# EAGLE board Integral_Granite (EAGLE 9.6.2)

Size 100 x 80 mm. Coordinates in mm from the lower left corner, seen from the top.
Outline: 0,0 100,0 100,80 0,80 0,0
Copper layers (1*16): Top 0.035mm / dielectric 1.5mm / Bottom 0.035mm
Design rules "default": minimum track width 6mil, minimum drill 0.35mm, track to track 6mil, track to pad 6mil, pad to pad 6mil, via to via 6mil, smd to smd 6mil, copper to edge 40mil, drill to drill 6mil, minimum pad ring 10mil, minimum via ring 8mil, stop-mask expansion 4mil, vias tented up to drill 0mil, thermal gap 10mil

## Footprints (pad centres in the part's own frame; a part is rotated, then mirrored left to right if it is on the bottom)
TB6643KQ = drill 1.05 pad 1.575 square: 1 0,0 | drill 1.05 pad 1.575: 2 2.54,0; 3 5.08,0; 4 7.62,0; 5 10.16,0; 6 12.7,0; 7 15.24,0
BS2PSHF1AALFSN = drill 1 pad 1.5: 1 -1.25,2.75; 2 1.25,2.75
C0603 = smd 1.1 x 1: 1 -0.85,0; 2 0.85,0
SE50PAJM3I = smd 3.1 x 2.2: 1 -1.21,0 | smd 1.5 x 1.52: 2 2.01,0
DIP762W60P254L460H425Q4N = drill 0.8 pad 1.2 square: 1 -3.81,1.27 | drill 0.8 pad 1.2: 2 -3.81,-1.27; 3 3.81,-1.27; 4 3.81,1.27
LEDC1608X36N = smd 0.7 x 0.95: 1 -0.9,0; 2 0.9,0
TO230P250X650X900-3P = drill 1.16 pad 1.74 square: 1 0,0 | drill 1.16 pad 1.74: 2 2.3,0; 3 4.6,0
R0603 = smd 1 x 1.1: 1 -0.85,0; 2 0.85,0
SHDRRA7W50P0X200_1X7_1590X760X = drill 0.9 pad 1.35 square: 1 0,0 | drill 0.9 pad 1.35: 2 -2,0; 3 -4,0; 4 -6,0; 5 -8,0; 6 -10,0; 7 -12,0
SHDRRA2W50P0X200_1X2_590X760X4 = drill 0.9 pad 1.35 square: 1 0,0 | drill 0.9 pad 1.35: 2 -2,0
GF063P = drill 1 pad 1.5: 1 0,0; 2 2.5,-2.5; 3 0,-5
HDRRA3W64P0X250_1X3_750X600X56 = drill 1.1 pad 1.65 square: 1 0,0 | drill 1.1 pad 1.65: 2 2.5,0; 3 5,0

## Placement (x,y rotation side)
A1  TB6643KQ  [TB6643KQ]  -58.42,67.31 0 top  (outside the outline)
A1M  BS2P-SHF-1AA__LF__SN_  [BS2PSHF1AALFSN]  -25.4,7.62 0 top  (outside the outline)
A2  TB6643KQ  [TB6643KQ]  -30.48,73.66 0 top  (outside the outline)
A2M  BS2P-SHF-1AA__LF__SN_  [BS2PSHF1AALFSN]  -49.53,7.62 0 top  (outside the outline)
B1  TB6643KQ  [TB6643KQ]  -50.8,73.66 0 top  (outside the outline)
B1M  BS2P-SHF-1AA__LF__SN_  [BS2PSHF1AALFSN]  -25.4,21.59 0 top  (outside the outline)
B2  TB6643KQ  [TB6643KQ]  -71.12,73.66 0 top  (outside the outline)
B2M  BS2P-SHF-1AA__LF__SN_  [BS2PSHF1AALFSN]  -49.53,21.59 0 top  (outside the outline)
C1  [C0603]  -43.18,77.47 0 top  (outside the outline)
D1  SE50PAJ-M3_I  [SE50PAJM3I]  -20.32,78.74 0 top  (outside the outline)
D2  SE50PAJ-M3_I  [SE50PAJM3I]  -34.29,78.74 0 top  (outside the outline)
IC5  TLP785_GB,F_  [DIP762W60P254L460H425Q4N]  -20.32,67.31 0 top  (outside the outline)
IC6  TLP785_GB,F_  [DIP762W60P254L460H425Q4N]  -34.29,67.31 0 top  (outside the outline)
LED1  SML-E12P8WT86  [LEDC1608X36N]  -45.72,82.55 0 top  (outside the outline)
LED2  SML-E12P8WT86  [LEDC1608X36N]  -62.23,82.55 0 top  (outside the outline)
LED3  SML-E12P8WT86  [LEDC1608X36N]  -21.59,86.36 0 top  (outside the outline)
Q1  2SK4017_Q_  [TO230P250X650X900-3P]  -19.05,82.55 0 top  (outside the outline)
Q2  2SK4017_Q_  [TO230P250X650X900-3P]  -31.75,82.55 0 top  (outside the outline)
R1  [R0603]  -46.99,77.47 0 top  (outside the outline)
R2  [R0603]  -50.8,77.47 0 top  (outside the outline)
R3  [R0603]  -54.61,77.47 0 top  (outside the outline)
R4  [R0603]  -58.42,77.47 0 top  (outside the outline)
R5  [R0603]  -62.23,77.47 0 top  (outside the outline)
R6  [R0603]  -66.04,77.47 0 top  (outside the outline)
R8  [R0603]  -69.85,77.47 0 top  (outside the outline)
R9  [R0603]  -73.66,77.47 0 top  (outside the outline)
SIGA  S7B-PH-K-S_LF__SN_  [SHDRRA7W50P0X200_1X7_1590X760X]  -57.15,44.45 0 top  (outside the outline)
SIGB  S7B-PH-K-S_LF__SN_  [SHDRRA7W50P0X200_1X7_1590X760X]  -22.86,57.15 0 top  (outside the outline)
SIGC  S2B-PH-K-S_LF__SN_  [SHDRRA2W50P0X200_1X2_590X760X4]  -46.99,57.15 0 top  (outside the outline)
VDD  S2B-PH-K-S_LF__SN_  [SHDRRA2W50P0X200_1X2_590X760X4]  -67.31,57.15 0 top  (outside the outline)
VDRIB  BS2P-SHF-1AA__LF__SN_  [BS2PSHF1AALFSN]  -25.4,35.56 0 top  (outside the outline)
VR1  GF063P  [GF063P]  -43.18,49.53 0 top  (outside the outline)
VS  BS3P-SHF-1AA__LF__SN_  [HDRRA3W64P0X250_1X3_750X600X56]  -25.4,45.72 0 top  (outside the outline)
VSOL  BS2P-SHF-1AA__LF__SN_  [BS2PSHF1AALFSN]  -49.53,35.56 0 top  (outside the outline)

## Library data of the parts
A1 A2 B1 B2 = TB6643KQ; DESCRIPTION: IC MOTOR DRIVER 10V-45V 7HSIP; HEIGHT: 16.5mm; MANUFACTURER_NAME: Toshiba; MANUFACTURER_PART_NUMBER: TB6643KQ
A1M A2M B1M B2M VDRIB VSOL = BS2P-SHF-1AA__LF__SN_; DESCRIPTION: JST NH Series, 2.5mm Pitch 2 Way 1 Row Right Angle PCB Header, Solder Termination, 3A; HEIGHT: 5mm; MANUFACTURER_NAME: JST (JAPAN SOLDERLESS TERMINALS); MANUFACTURER_PART_NUMBER: BS2P-SHF-1AA (LF)(SN); RS_PART_NUMBER: 5468552; RS_PRICE-STOCK: http://uk.rs-online.com/web/p/products/5468552
C1 = rcl; SPICEPREFIX: C
D1 D2 = SE50PAJ-M3_I; DESCRIPTION: DIODE GEN PURP 600V 1.6A DO221BC; HEIGHT: 1mm; MANUFACTURER_NAME: Vishay; MANUFACTURER_PART_NUMBER: SE50PAJ-M3/I
IC5 IC6 = TLP785_GB_F_; DESCRIPTION: Transistor Output Optocouplers Photo-IC 60mA 80V 5000 Vrms 8000 Vpk; HEIGHT: 4.25mm; MANUFACTURER_NAME: Toshiba; MANUFACTURER_PART_NUMBER: TLP785(GB,F)
LED1-LED3 = SML-E12P8WT86; DESCRIPTION: Standard LEDs - SMD SMD Green 2.5-16 mcd; HEIGHT: 0.36mm; MANUFACTURER_NAME: ROHM Semiconductor; MANUFACTURER_PART_NUMBER: SML-E12P8WT86; RS_PART_NUMBER: 7526865; RS_PRICE-STOCK: https://uk.rs-online.com/web/p/products/7526865
Q1 Q2 = 2SK4017_Q_; DESCRIPTION: MOSFET,Nch,60V/5A/0.1ohm,New Pw-Mold2; HEIGHT: 2.5mm; MANUFACTURER_NAME: Toshiba; MANUFACTURER_PART_NUMBER: 2SK4017(Q); RS_PART_NUMBER: 0185580; RS_PRICE-STOCK: http://uk.rs-online.com/web/p/products/0185580
R1-R6 R8 R9 = rcl; SPICEPREFIX: R
SIGA SIGB = S7B-PH-K-S_LF__SN_; DESCRIPTION: JST PH Series, Series Number S7B, 2mm Pitch 7 Way 1 Row Right Angle PCB Header, Through Hole Termination, 2A; HEIGHT: 4.8mm; MANUFACTURER_NAME: JST (JAPAN SOLDERLESS TERMINALS); MANUFACTURER_PART_NUMBER: S7B-PH-K-S(LF)(SN); RS_PART_NUMBER: 8201513P; RS_PRICE-STOCK: http://uk.rs-online.com/web/p/products/8201513P
SIGC VDD = S2B-PH-K-S_LF__SN_; DESCRIPTION: PH-2.0mm Header side entry 2 way JST PH Series, Series Number S2B, 2mm Pitch 2 Way 1 Row Right Angle PCB Header, Through Hole Termination, 2A; HEIGHT: 4.8mm; MANUFACTURER_NAME: JST (JAPAN SOLDERLESS TERMINALS); MANUFACTURER_PART_NUMBER: S2B-PH-K-S(LF)(SN); RS_PART_NUMBER: 8201494P; RS_PRICE-STOCK: http://uk.rs-online.com/web/p/products/8201494P
VR1 = GF063P; DESCRIPTION: 1/4 Square, Single-Turn, Through-Hole Sealed Cermet Trimmers; HEIGHT: 5.8mm; MANUFACTURER_NAME: Tocos; MANUFACTURER_PART_NUMBER: GF063P
VS = BS3P-SHF-1AA__LF__SN_; DESCRIPTION: JST HVQ Series, 2.5mm Pitch 3 Way 1 Row Right Angle PCB Header, Solder Termination, 3A; HEIGHT: 5.6mm; MANUFACTURER_NAME: JST (JAPAN SOLDERLESS TERMINALS); MANUFACTURER_PART_NUMBER: BS3P-SHF-1AA (LF)(SN); RS_PART_NUMBER: 5468568; RS_PRICE-STOCK: http://uk.rs-online.com/web/p/products/5468568

## Nets
+3V3: D1.1 IC5.4 IC6.4 R1.2 VDD.1 VDRIB.1
+12V: A1.7 A2.7 B1.7 B2.7 VS.2
+24V: D2.1 VS.1 VSOL.1
DRIBBLER: R2.2 R4.2 SIGC.1
GND: A1.4 A2.4 B1.4 B2.4 IC5.2 IC6.2 LED1.1 LED2.1 LED3.1 Q1.3 Q2.3 R8.1 R9.1 SIGA.1 SIGA.4 SIGA.7 SIGB.1 SIGB.4 SIGB.7 VDD.2 VR1.3 VS.3
KICKER: R5.2 SIGC.2
KICKISO: C1.1 IC6.3 R3.2 R8.2
KICKSIG: C1.2 Q2.1 VR1.1 VR1.2
N$1: A1.1 SIGA.2
N$2: A1.2 SIGA.3
N$3: A2.1 SIGA.5
N$4: A2.2 SIGA.6
N$5: B1.1 SIGB.2
N$6: B1.2 SIGB.3
N$7: B2.1 SIGB.5
N$8: B2.2 SIGB.6
N$9: A1.3 A1M.1
N$10: A1.5 A1M.2
N$11: A2.3 A2M.1
N$12: A2.5 A2M.2
N$13: B1.3 B1M.1
N$14: B1.5 B1M.2
N$15: B2.3 B2M.1
N$16: B2.5 B2M.2
N$17: LED1.2 R1.1
N$18: LED2.2 R2.1
N$19: LED3.2 R3.1
N$20: D1.2 Q1.2 VDRIB.2
N$22: D2.2 Q2.2 VSOL.2
N$24: Q1.1 R6.1 R9.2
N$25: IC5.1 R4.1
N$26: IC6.1 R5.1
N$27: IC5.3 R6.2

## Tracks (layer width: path | path; a pad name or v marks a point on that pad's centre or on a via)
+3V3  (5 unrouted)
+12V  (4 unrouted)
+24V  (2 unrouted)
DRIBBLER  (2 unrouted)
GND  (21 unrouted)
KICKER  (1 unrouted)
KICKISO  (3 unrouted)
KICKSIG  (3 unrouted)
N$1  (1 unrouted)
N$2  (1 unrouted)
N$3  (1 unrouted)
N$4  (1 unrouted)
N$5  (1 unrouted)
N$6  (1 unrouted)
N$7  (1 unrouted)
N$8  (1 unrouted)
N$9  (1 unrouted)
N$10  (1 unrouted)
N$11  (1 unrouted)
N$12  (1 unrouted)
N$13  (1 unrouted)
N$14  (1 unrouted)
N$15  (1 unrouted)
N$16  (1 unrouted)
N$17  (1 unrouted)
N$18  (1 unrouted)
N$19  (1 unrouted)
N$20  (2 unrouted)
N$22  (2 unrouted)
N$24  (2 unrouted)
N$25  (1 unrouted)
N$26  (1 unrouted)
N$27  (1 unrouted)